# Altium PCB SimpleFlashlight.PcbDoc
Units mm, origin at the board's own origin, x right, y up, seen from the top; angles counter-clockwise.
Board outline 26 x 18.2 mm, 2 copper layers (Top Layer, Bottom Layer), stack 1 mm thick; 17 components, 9 nets, 35 pads, 9 vias.
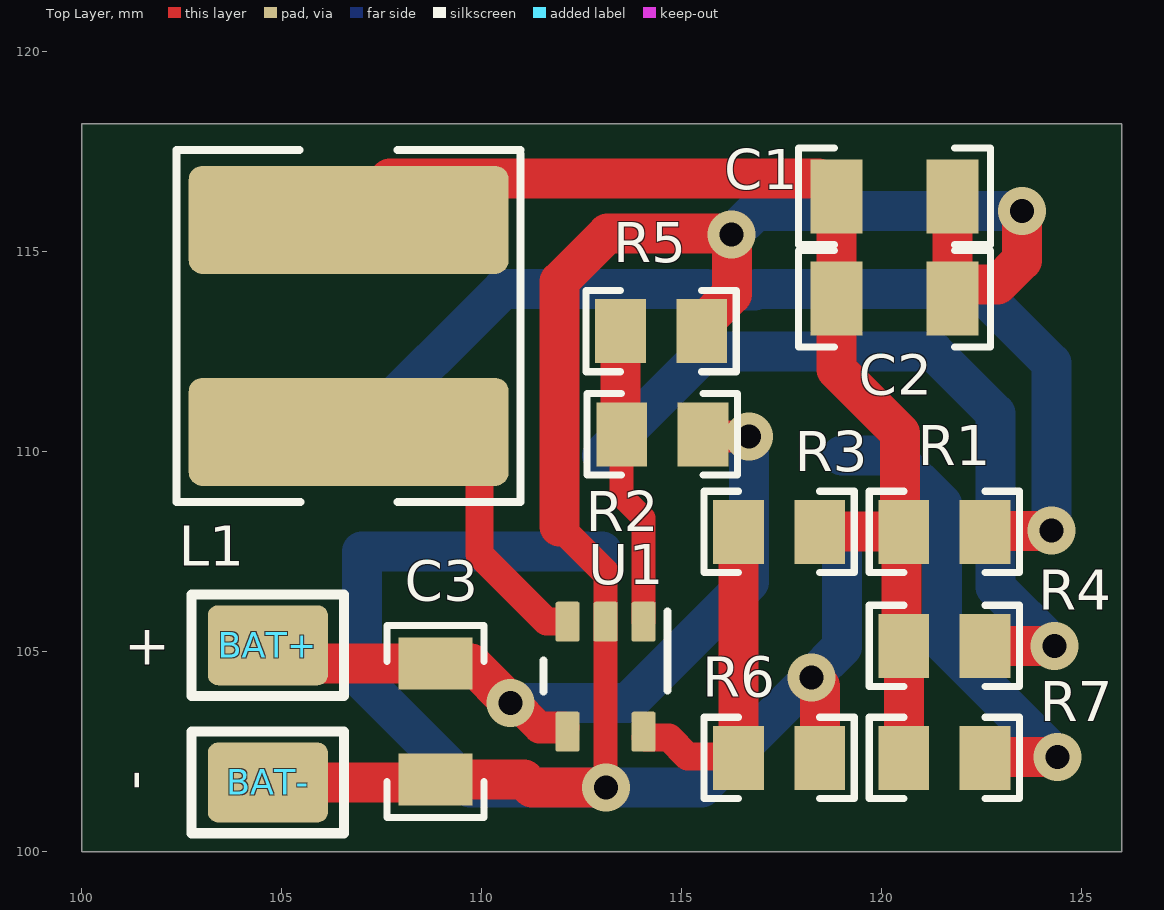
[diagram p0: Top Layer view]
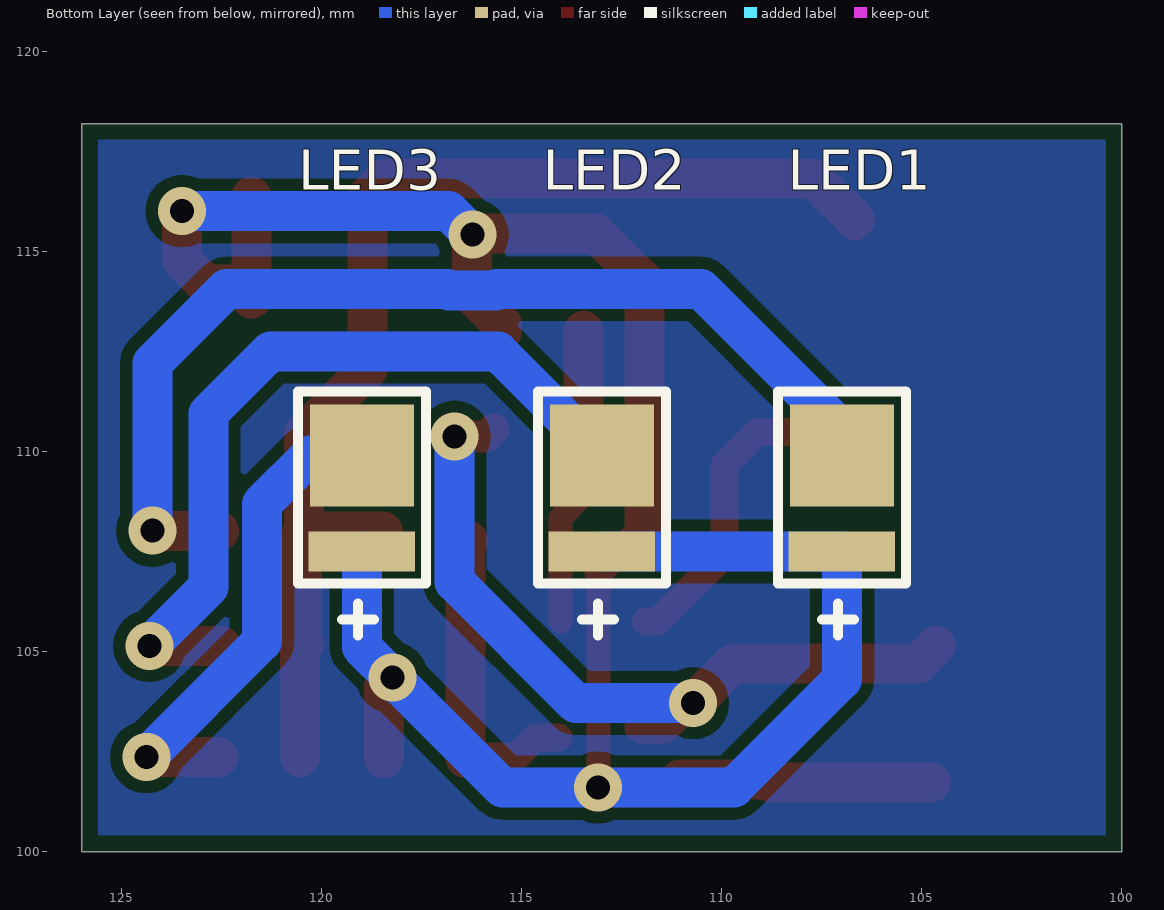
[diagram p1: Bottom Layer view, seen from below]
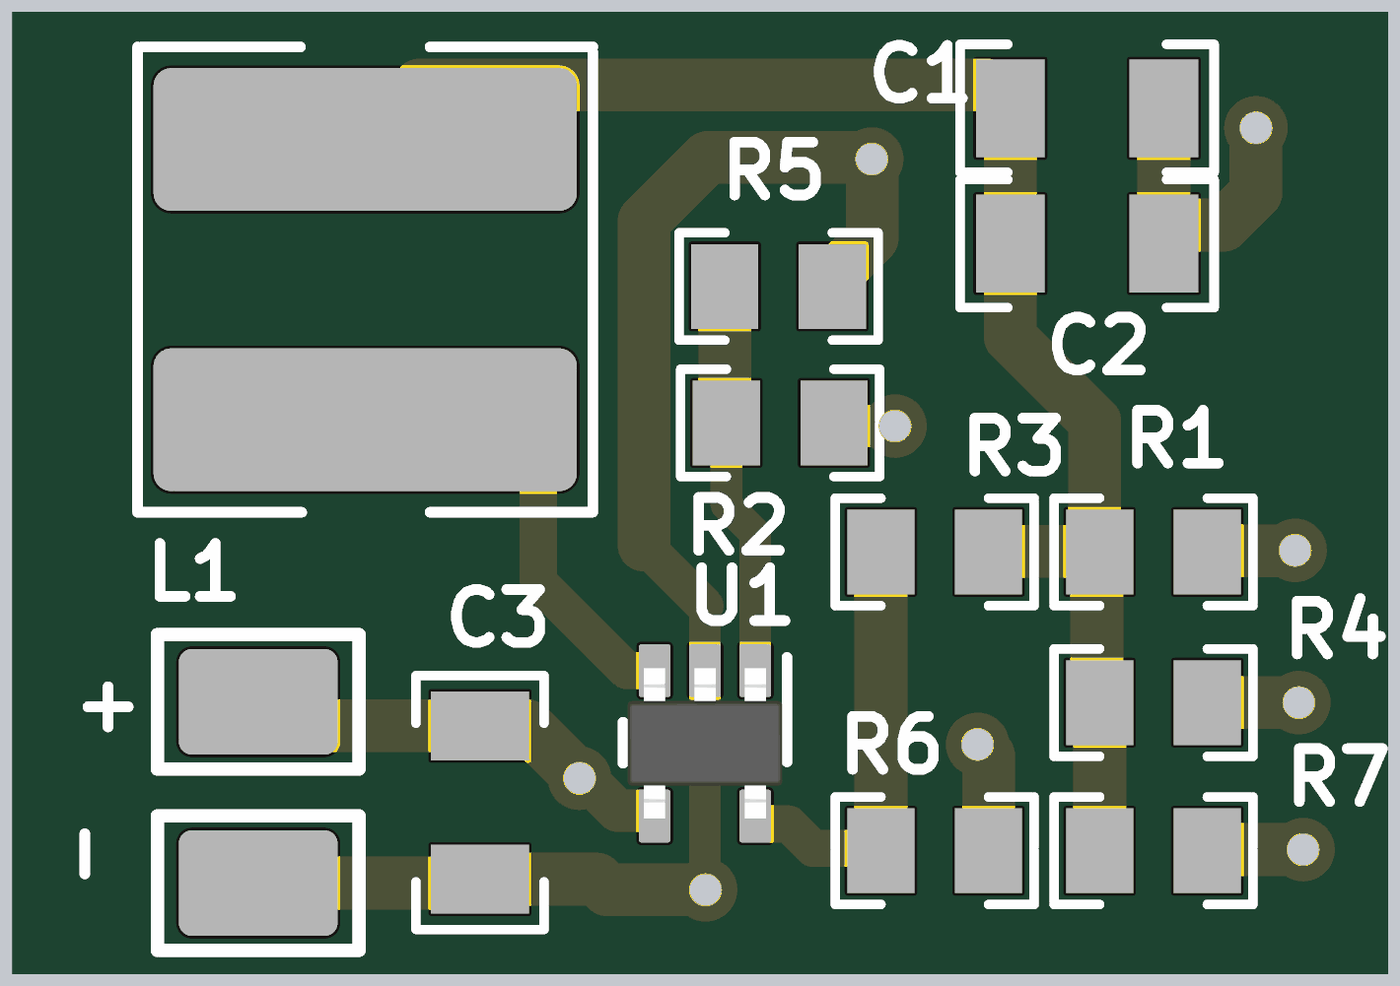
[diagram p2: 3D render of the assembled board from above, using the file's embedded part models]
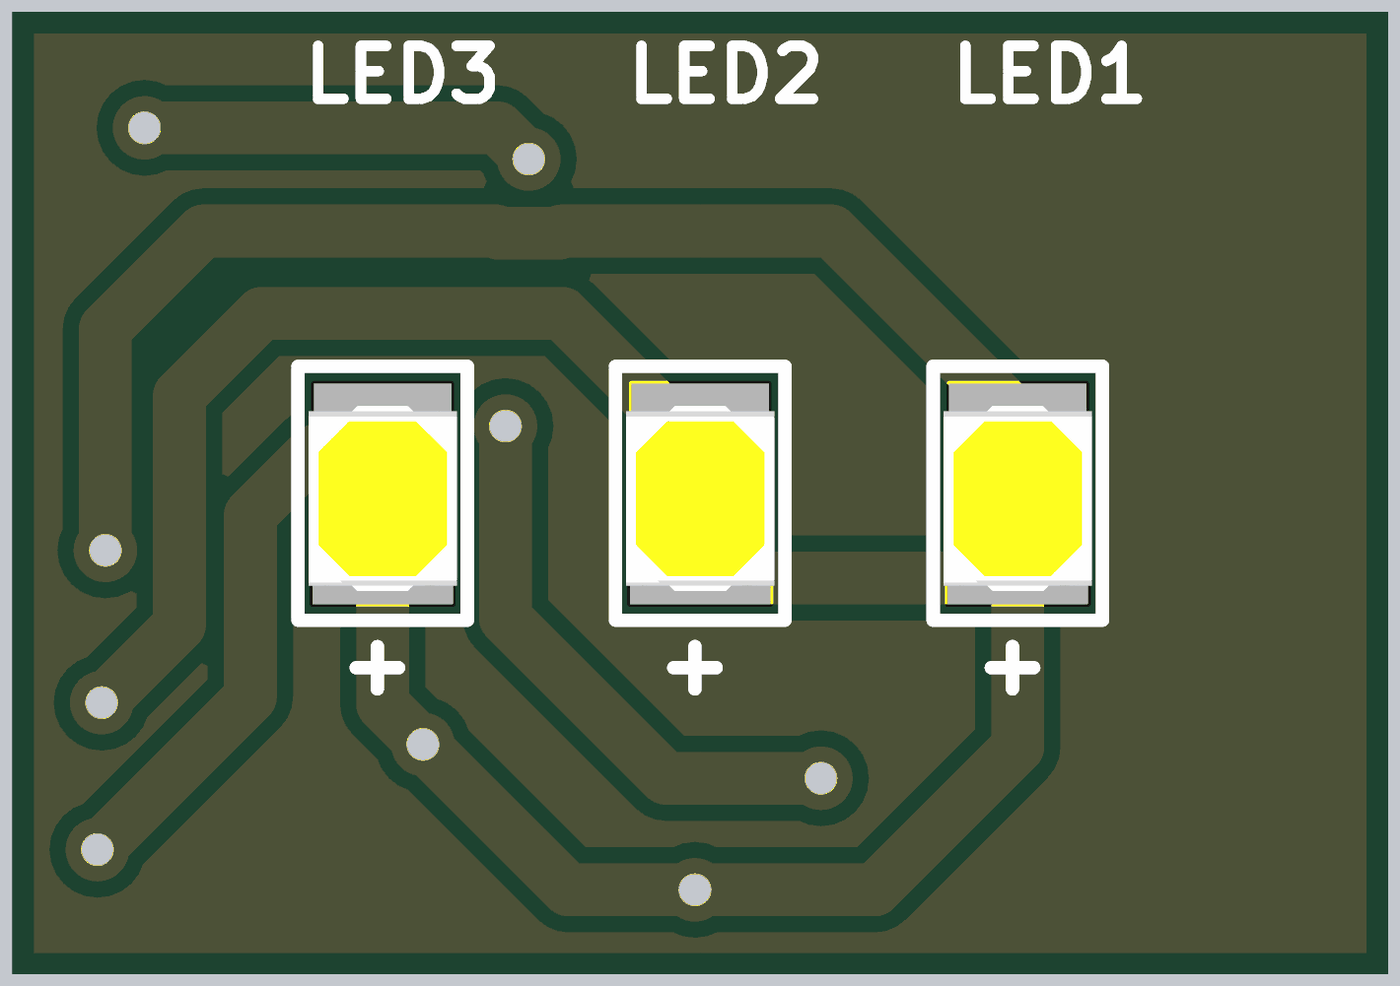
[diagram p3: 3D render of the assembled board from below, using the file's embedded part models]

## Layer stack, top to bottom
Top Solder: solder mask 0.04, Solder Resist, Dk 3.5
Top Layer: signal copper 0.018
Dielectric 1: dielectric 0.964, FR-4, Dk 4.8
Bottom Layer: signal copper 0.018
Bottom Solder: solder mask 0.04, Solder Resist, Dk 3.5

## Board outline
100,100 100,118.2 126,118.2 126,100

## Design rules (kind name [scope] priority, off if disabled: settings)
BoardOutlineClearance [All] p1: gap=0.4 ignorepadtopadclearanceinfootprint=FALSE
Clearance Clearance_different_net [All] p1: gap=0.3 ignorepadtopadclearanceinfootprint=FALSE
DiffPairsRouting [All] p1 off: maxlimit=0.254 minlimit=0.254 mostfreqgap=0.254 toplayer_minwidth=0.381 toplayer_maxwidth=0.381 toplayer_prefwidth=0.381 bottomlayer_minwidth=0.381 bottomlayer_maxwidth=0.381 bottomlayer_prefwidth=0.381 maxuncoupledlength=12.7
HoleSize [All] p1: absolutevalues=TRUE maxlimit=6.3 minlimit=0.2 maxpercent=80.000 minpercent=20.000 // Drill Hole Size Tolerance +0.13/-0.08mm
HoleToHoleClearance [All] p1: gap=0.5 allowstackedmicrovias=TRUE
MinimumAnnularRing [All] p1: minimumring=0.3 // For PTH
MinimumSolderMaskSliver [All] p1: minsoldermaskwidth=0.2
PlaneConnect [All] p1: planeconnectstyle=Relief reliefexpansion=0.508 reliefentries=4 reliefconductorwidth=0.3 reliefairgap=0.254
PolygonConnect [All] p1: connectstyle=Relief reliefconductorwidth=0.5 reliefentries=4 polygonreliefangle="90 Angle" airgapwidth=0.254
RoomDefinition ComponentsArea [All] p1: confinementstyle=ConfineIn formatcopy=TRUE lockcomponents=FALSE outline 100,99.95 cw(c100,100) 100,100.05 102.801,100.05 cw(c103.25,101) 102.2,101 102.2,117.2 cw(c103.25,117.2) 102.801,118.15 100,118.15 cw(c100,118.2) 100,118.25 126,118.25 cw(c126,118.2) 126.05,118.2 cw(c126,118.2) 126,118.15 123.199,118.15 cw(c122.75,117.2) 123.8,117.2 123.8,101 cw(c122.75,101) 123.199,100.05 126,100.05 cw(c126,100) 126.05,100 cw(c126,100) 126,99.95
RoutingVias [All] p1: holewidth=0.6 width=1.2 viastyle="Through Hole" minholewidth=0.3 minwidth=0.6 maxholewidth=5 maxwidth=5
SilkToSilkClearance [All] p1: silktosilkclearance=0.2
SilkToSolderMaskClearance [IsPad] p1: minsilkscreentomaskgap=0.1 clearancetoexposedcopper=TRUE
SolderMaskExpansion [All] p1: expansion=0.05
Width [All] p1: maxlimit=5 minlimit=0.3 preferedwidth=1
23 further rules are at their usual default settings.

## Components (designator, comment, footprint, x,y, rotation, side; value= is the part's Value field where it differs from the comment)
BAT+ "+" KEYSTONE5000 104.648,105.156 r180 top
BAT- "-" KEYSTONE5000 104.648,101.727 r180 top
C1 "22uF" 1206 120.31,116.38 r0 top
C2 "1uF" 1206 120.31,113.82 r0 top
C3 "10uF" 1206 108.839,103.251 r270 top
L1 "10uH" WE-PD_6033 106.67,113.14 r90 top
LED1 "2.8V 0.07A" "LED 2835" 107,109.1 r270 bottom
LED2 "2.8V 0.07A" "LED 2835" 113,109.1 r270 bottom
LED3 "2.8V 0.07A" "LED 2835" 119,109.1 r270 bottom
R1 "6.8" 0805_HV 121.564,107.99 r0 top
R2 "12k" 0805_HV 114.51,110.43 r0 top
R3 "62k" 0805_HV 117.43,107.99 r0 top
R4 "6.8" 0805_HV 121.564,105.14 r0 top
R5 "11k" 0805_HV 114.48,113.01 r180 top
R6 "20k" 0805_HV 117.43,102.34 r180 top
R7 "6.8" 0805_HV 121.564,102.34 r0 top
U1 "TPS560200DBVR" DBV0005A_N 113.09,104.37 r270 top

## Footprints (in the part's own frame and the unit in brackets; to place one, negate y for a bottom-side part, rotate by r counter-clockwise, add the part's x,y. Pads: shape width x height; smd on the part's side, far side on the other; paste and mask are expansions set on the pad)
0805_HV [mil]
  rect 50x63 smd: 1(-40,0) 2(40,0)
  silkscreen extent -74,-40 74,40, body extent -50,-25 50,25, height 22
1206 [mm]
  rect 1.3x1.85 smd: 1(-1.45,0) 2(1.45,0)
  silkscreen extent -2.4,-1.21 2.4,1.21, body extent -1.63,-0.79 1.57,0.84, height 1.64
DBV0005A_N [mm]
  rrect17% 1x0.6 smd: 1(-1.375,0.95) 2(-1.375,0) 3(-1.375,-0.95) 4(1.375,-0.95) 5(1.375,0.95)
  silkscreen extent -1.63,-1.55 0.38,1.55, body extent -1.42,-1.46 1.42,1.46, height 1.09
KEYSTONE5000 [mm]
  rrect25% 3x2 smd: 1(0,0)
  silkscreen extent -1.91,-1.27 1.91,1.27, body extent -1.25,-1.24 1.24,1.25, height 0.03
"LED 2835" [mm]
  rect 2.55x2.6 smd: 1(-0.8,0)
  rect 1x2.66 smd: 2(1.6,0)
  silkscreen extent -2.4,-1.6 3.7,1.6, body extent -1.65,-1.4 1.85,1.4, height 1.62
WE-PD_6033 [mm]
  rrect25% 2.7x8 smd: 1(-2.65,0) 2(2.65,0)
  silkscreen extent -4.4,-4.3 4.4,4.3, body extent -3.9,-3.9 3.9,3.9, height 5.31

## Part data
BAT+: library part 5000, "Power connection pad", ComponentLink1Description="Datasheet Link", ComponentLink1URL=http://www.keyelco.com/userAssets/file/M60-2p60.pdf, CompType="Test Point Loop"
BAT-: library part 5001, "Power connection pad", ComponentLink1Description="Datasheet Link", ComponentLink1URL=http://www.keyelco.com/userAssets/file/M60-2p60.pdf, CompType="Test Point Loop"
C1: library part Capacitor, "Capacitor ceramic", Manufacturer=MuRata, Manufacturer Part Number=GRM31CR61C226KE15L, ComponentLink1Description="Datasheet link", ComponentLink1URL=http://search.murata.co.jp/Ceramy/PnsearchViewAction.do?HnOFG=ON&HnNFG=ON&SEL_CNT=50&sLang=en&sKey=GRM188R71C105KA12D&x=9&y=9&search=startwith, Order_Code_ChipIDip=9000103922
C2: library part Capacitor, "Capacitor ceramic", Manufacturer=MuRata, Manufacturer Part Number=GRM188R61A105K, ComponentLink1Description="Datasheet link", ComponentLink1URL=http://search.murata.co.jp/Ceramy/PnsearchViewAction.do?HnOFG=ON&HnNFG=ON&SEL_CNT=50&sLang=en&sKey=GRM188R71C105KA12D&x=9&y=9&search=startwith, Order_Code_ChipIDip=886959440
C3: library part Capacitor, "Capacitor ceramic", Manufacturer=MuRata, Manufacturer Part Number=GRM21BR71A106KE51L, ComponentLink1Description="Datasheet link", ComponentLink1URL=http://search.murata.co.jp/Ceramy/PnsearchViewAction.do?HnOFG=ON&HnNFG=ON&SEL_CNT=50&sLang=en&sKey=GRM188R71C105KA12D&x=9&y=9&search=startwith, Order_Code_ChipIDip=9000122622
L1: library part Inductor, "Inductor, Unshielded Drum Core, Metal Composite, SMD", Manufacturer=Bourns, Manufacturer Part Number=SDR0805-100ML, ComponentLink1Description="Datasheet link", ComponentLink1URL=http://katalog.we-online.de/kataloge/eisos/media/pdf/744778510.pdf, CompType=Inductor, Order_Code_ChipIDip=246436964
LED1 LED2 LED3: library part "SMD LED", "SMD LED", CurrentMAX=0.07, ForvardVoltage=2.82, Manufacturer=ENLINCA, Manufacturer Part Number=None, ComponentLink1Description="Datasheet link", ComponentLink1URL=http://www.vishay.com/docs/88516/1n5400.pdf, Order_Code_ChipIDip=None, ProductLink=https://aliexpress.ru/item/32975372003.html?spm=a2g39.orderlist.0.0.22a94aa61JPlpc&_ga=2.238780616.970507921.1639827810-654681520.1604340042&_gac=1.162479310.1639346332.Cj0KCQiA2NaNBhDvARIsAEw55hg0RpnmDiEVLwfBwV1DBwQRRzTZISLV43c0hEMg0tSMQHOqo776kiQaArGpEALw_wcB, Type="SMD LED"
R1 R4 R7: library part Resistor, "Thick Film Chip Resistor", Manufacturer=Yageo, Manufacturer Part Number=RC0805FR-076R8L, ComponentLink1Description="Manufacturer Link", ComponentLink1URL=http://www.panasonic.com/industrial/components/resistive_products.htm, ComponentLink2Description=Datasheet, ComponentLink2URL=http://www.panasonic.com/industrial/components/pdf/AOA0000CE2.pdf, Order_Code_ChipIDip=9000079932
R2: library part Resistor, "Thick Film Chip Resistor", Manufacturer=Yageo, Manufacturer Part Number=RC0805FR-0712KL, ComponentLink1Description="Manufacturer Link", ComponentLink1URL=http://www.panasonic.com/industrial/components/resistive_products.htm, ComponentLink2Description=Datasheet, ComponentLink2URL=http://www.panasonic.com/industrial/components/pdf/AOA0000CE2.pdf, Order_Code_ChipIDip=9000079516
R3: library part Resistor, "Thick Film Chip Resistor", Manufacturer=Yageo, Manufacturer Part Number=RC0805FR-0762KL, ComponentLink1Description="Manufacturer Link", ComponentLink1URL=http://www.panasonic.com/industrial/components/resistive_products.htm, ComponentLink2Description=Datasheet, ComponentLink2URL=http://www.panasonic.com/industrial/components/pdf/AOA0000CE2.pdf, Order_Code_ChipIDip=9000079533
R5: library part Resistor, "Thick Film Chip Resistor", Manufacturer=Yageo, Manufacturer Part Number=RC0805FR-0711KL, ComponentLink1Description="Manufacturer Link", ComponentLink1URL=http://www.panasonic.com/industrial/components/resistive_products.htm, ComponentLink2Description=Datasheet, ComponentLink2URL=http://www.panasonic.com/industrial/components/pdf/AOA0000CE2.pdf, Order_Code_ChipIDip=9000079515
R6: library part Resistor, "Thick Film Chip Resistor", Manufacturer=Yageo, Manufacturer Part Number=RC0805FR-0720KL, ComponentLink1Description="Manufacturer Link", ComponentLink1URL=http://www.panasonic.com/industrial/components/resistive_products.htm, ComponentLink2Description=Datasheet, ComponentLink2URL=http://www.panasonic.com/industrial/components/pdf/AOA0000CE2.pdf, Order_Code_ChipIDip=9000079521
U1: "4.5V to 18V Input, 500mA Synchronous Step Down SWIFT Converter with Advanced Eco-mode, DBV0005A", Manufacturer="Texas Instruments", ComponentLink1Description="Datasheet Link", ComponentLink1URL=http://www.ti.com/lit/ds/symlink/tps560200.pdf, Manufacturer Part Number=TPS560200DBVR, Order_Code_ChipIDip=9000200421, PackageReference=DBV0005A

## Via types
v1: diameter 1.2, hole 0.6, Top Layer to Bottom Layer, tented both sides, 9 vias

## Nets (pads, with @x,y where several pads share a name; then routed paths per layer and width w, separated by ;. In a path a pad name is that pad's centre, name@x,y a point inside that pad or via, vN(x,y) a via of type N, cw(c..) or ccw(c..) an arc to the next point about the centre after c; other vN are vias at no path point)
+3.3V: C1.1 C2.1 L1.2 R1.1 R3.2 R4.1 R7.1 | length 29.6
  Top Layer w1: L1.2 107.7,116.82 118.42,116.82 C1.1 C2.1 118.86,112.052 120.454,110.458 R1.1@120.454,108 ; R3.2@118.476,108 R1.1@120.454,108 ; R4.1@120.454,105.18 R4.1@120.494,105.14 ; R7.1@120.548,102.36 120.548,105.086 R4.1@120.494,105.14 ; R1.1@120.454,108 120.494,107.96 R4.1@120.494,105.14
+9V: BAT+.1 C3.1 R2.2 U1.4 | length 20.1
  Top Layer w0.8: v1@110.745,103.735 110.803,103.735 111.443,103.095 U1.4@112.04,103.095 ; R2.2@115.706,110.55 115.886,110.37 v1(116.68,110.37)
  Top Layer w1: BAT+.1 105.103,104.701 C3.1 109.729,104.701 v1(110.72,103.71)
  Bottom Layer w1: v1(110.72,103.71) 113.65,103.71 116.68,106.74 v1(116.68,110.37)
EN: R2.1 R5.2 U1.1 | length 7.5
  Top Layer w0.6: R2.1@113.464,110.46 R2.1 113.494,108.886 114.04,108.34 U1.1
  Top Layer w1: R2.1@113.464,110.46 R5.2
GND: BAT-.1 C1.2 C2.2 C3.2 LED1.2 LED2.2 LED3.2 R5.1 R6.1 U1.2 | length 70.8
  Top Layer w0.6: v1@113.09,101.6 U1.2 113.09,106.97
  Top Layer w0.7: 111.94,108.12 113.09,106.97
  Top Layer w1: BAT-.1@104.775,101.727 108.765,101.727 C3.2 111.05,101.801 111.251,101.6 113.09,101.6 v1(113.1,101.6) ; 111.94,108.12 111.94,114.25 113.14,115.45 116.25,115.45 116.25,113.929 115.496,113.175 R5.1 ; v1(118.24,104.35) 118.446,104.144 R6.1 ; C1.2 C2.2 122.11,114.17 122.89,114.17 123.5,114.78 v1(123.5,116.01)
  Bottom Layer w1: LED2.2 LED1.2 107,104.3 109.7,101.6 v1(113.1,101.6) 115.49,101.6 v1(118.24,104.35) 119,105.11 LED3.2 ; v1(116.24,115.42) 116.83,116.01 v1(123.5,116.01)
NetL1_1: L1.1 U1.3 | length 8.5
  Top Layer w0.7: L1.1 109.11,110.49 109.94,109.66 109.94,107.42 111.615,105.745 U1.3@111.91,105.745
NetLED1_1: LED1.1 R1.2 | length 26
  Top Layer w1: R1.2@122.576,108.01 124.23,108.01 v1(124.24,108.02)
  Bottom Layer w1: LED1.1 107,110.54 110.52,114.06 115.62,114.06 115.66,114.02 116.82,114.02 116.86,114.06 122.39,114.06 124.24,112.21 v1(124.24,108.02)
NetLED2_1: LED2.1 R4.2 | length 19.8
  Top Layer w1: R4.2@122.526,105.14 v1(124.31,105.14)
  Bottom Layer w1: LED2.1 115.6,112.5 121.29,112.5 122.84,110.95 122.84,106.61 v1(124.31,105.14)
NetLED3_1: LED3.1 R7.2 | length 12.3
  Top Layer w1: R7.2@122.58,102.36 v1(124.39,102.36)
  Bottom Layer w1: LED3.1 120.29,109.9 121.5,108.69 121.5,105.25 v1(124.39,102.36)
VSENSE: R3.1 R6.2 U1.5 | length 7.9
  Top Layer w0.7: U1.5@114.09,102.845 114.675,102.845 115.139,102.381 116.155,102.381 R6.2@116.264,102.49
  Top Layer w1: R3.1@116.35,107.774 116.414,107.71 R6.2

## Polygon pours and split planes (outlines as drawn)
no net on Bottom Layer "NONET_L02_P003" (solid, pour order 3): 100,100 100,118.2 126,118.2 126,100

## Silkscreen, mask and mechanical layers (free items; w line width, h text height)
M1-Board Shape:
  lines w0.1: 103.25,100 107.135,100 118.865,100 122.75,100 ; 103.25,118.2 107.671,118.2 118.329,118.2 122.75,118.2 ; 100,100 100,118.2 126,118.2 126,100 100,100
M7-Top Info:
  lines w0.1: 103.25,100 cw(c103.25,101) 102.25,101 102.25,107.1 102.25,117.2 cw(c103.25,117.2) 103.25,118.2 ; 122.75,100 ccw(c122.75,101) 123.75,101 123.75,107.1 123.75,117.2 ccw(c122.75,117.2) 122.75,118.2
M8-Bottom Info:
  lines w0.1: 100,109.1 126,109.1 ; 113,100 113,118.2
M9-Top Stiffener:
  lines w0.203: 0.13,60.455 5.21,60.455 ; 0.13,120.78 5.21,120.78 ; 0.13,181.105 5.21,181.105 ; 63.63,0.13 63.63,5.21 ; 63.63,236.35 63.63,241.43 ; 127.13,0.13 127.13,5.21 ; 127.13,236.35 127.13,241.43 ; 173.167,5.21 173.167,20.704 299.723,20.704 ; 190.63,0.13 190.63,5.21 ; 190.63,236.35 190.63,241.43 ; 254.13,0.13 254.13,5.21 ; 254.13,236.35 254.13,241.43 ; 299.723,5.21 299.723,20.704 ; 299.723,13.084 375.923,13.084 ; 299.723,28.324 375.923,28.324 ; 299.748,43.412 375.948,43.412 ; 317.63,0.13 317.63,5.21 ; 317.63,236.35 317.63,241.43 ; 337.95,5.464 337.95,20.704 ; 375.923,20.704 299.723,20.704 ; 375.923,35.944 299.723,35.944 ; 376.05,35.69 376.05,5.21 ; 376.05,56.124 299.748,56.124 299.723,56.124 299.723,43.412 299.723,35.944 ; 376.05,60.455 381.13,60.455 ; 376.05,120.78 381.13,120.78 ; 376.05,181.105 381.13,181.105 ; 299.723,20.704 299.723,35.944 ; 376.05,5.21 376.05,236.35 5.21,236.35 5.21,5.21 376.05,5.21 ; 0.13,0.13 0.13,241.43 381.13,241.43 381.13,0.13 0.13,0.13
  text "1" at 31.406,238.128 h1.78
  text "2" at 94.796,238.128 h1.78
  text "3" at 158.025,238.128 h1.78
  text "4" at 221.694,238.128 h1.78
  text "5" at 285.169,238.128 h1.78
  text "6" at 348.796,238.128 h1.78
  text "A" at 2.035,209.096 h1.78
  text "A" at 377.955,209.096 h1.78
  text "B" at 2.035,148.644 h1.78
  text "B" at 377.955,148.644 h1.78
  text "C" at 2.035,88.319 h1.78
  text "C" at 377.955,88.319 h1.78
  text "PROJECT TITLE:" at 300.739,41.049 h1.14
  text ".PRJ_Title" at 304.612,37.633 h1.27
  text "DESIGNED FOR:" at 300.739,33.404 h1.14
  text ".PRJ_Customer" at 302.009,29.848 h1.78
  text "D" at 2.035,28.121 h1.78
  text "D" at 377.955,28.121 h1.78
  text "FILE NAME:" at 300.739,25.784 h1.14
  text ".PCB_File_Name_No_Path" at 302.009,22.736 h1.78
  text "... and/or its licensors do not warrant the accuracy or completeness of this specification" at 174.514,18.625 h1.14
  text "ENGINEER:" at 300.739,18.418 h1.14
  text "LAYOUT BY:" at 338.966,18.418 h1.14
  text "or any information contained therein. ... and/or its licensors do not warrant that this design will meet" at 173.371,15.764 h1.14
  text ".PRJ_Engineer" at 302.009,14.481 h1.78
  text ".PCB_Layout" at 340.249,14.481 h1.78
  text "the specifications, will be suitable for your application or fit for any particular purpose, or will operate in" at 173.371,12.902 h1.14
  text "ALTIUM DESIGNER VERSION:" at 338.966,10.544 h1.14
  text "an implementation. ... and/or its licensors do not warrant that the design is production worthy. You should" at 173.371,10.04 h1.14
  text "completely validate and test your design implementation to confirm the system functionality for your application." at 174.514,7.178 h1.14
  text ".print_Scale" at 302.009,7.157 h1.78
  text ".Application_BuildNumber" at 340.249,7.157 h1.78
  text "2" at 94.796,1.908 h1.78
  text "3" at 158.025,1.908 h1.78
  text "4" at 221.694,1.908 h1.78
  text "5" at 285.169,1.908 h1.78
  text "6" at 348.796,1.908 h1.78
M10-Bottom Stiffener:
  drawing of 228 lines, arcs and shapes, not listed
  text "DESIGN INFORMATION" at 327.102,206.854 h1.52
  text "(REFER ALSO ARRAY/PANEL PROFILING INFORMATION)" at 317.918,202.746 h1.52
  text "BOARD SIZE" at 300.494,202.637 h1.52
  text "69mm" at 312.237,199.391 h1.52
  text "X" at 325.081,199.391 h1.52
  text "70mm" at 330.956,199.391 h1.52
  text "Number of Layers :" at 310.73,194.382 h1.52
  text "4" at 338.538,194.128 h1.52
  text "MIN. TRACK WIDTH:" at 310.73,190.852 h1.52
  text "8" at 338.574,190.852 h1.52
  text "MIL" at 342.505,190.852 h1.52
  text "MIN. CLEARANCE:" at 310.73,187.499 h1.52
  text "MIL" at 342.505,187.499 h1.52
  text "7" at 337.566,187.423 h1.52
  text "MIN. VIA DRILL SIZE:" at 310.73,184.146 h1.52
  text "MIL" at 342.505,184.146 h1.52
  text "7.87" at 336.042,184.07 h1.52
  text "5.91 MIL" at 328.383,180.547 h1.52
  text "MINIMUM ANNULAR RING" at 302.367,180.438 h1.52
  text "EXTERNAL" at 346.366,180.438 h1.52
  text "PER" at 307.447,177.44 h1.52
  text "IPC-D-275 CLASS 2 LEVEL C" at 313.035,177.44 h1.52
  text "MIL, HOLES" at 350.836,174.588 h1.52
  text "+/-" at 340.868,174.57 h1.52
  text "+/-" at 362.56,174.57 h1.52
  text "REGISTRATION TOLERANCES:" at 302.367,174.443 h1.52
  text "METAL" at 332.842,174.443 h1.52
  text "5" at 347.477,174.443 h1.52
  text "3" at 368.635,174.443 h1.52
  text "MIL" at 371.588,174.443 h1.52
  text "MATERIAL:" at 300.468,169.123 h1.52
  text "FR-4 High Tg" at 325.524,165.558 h1.52
  text "X" at 321.462,165.375 h1.52
  text "FR-408" at 311.162,165.341 h1.52
  text "OTHER" at 348.957,165.341 h1.52
  text "63 MIL (1.6mm) +/-10%" at 319.292,161.208 h1.52
  text "THICKNESS:" at 302.367,161.099 h1.52
  text "X" at 316.037,161.099 h1.52
  text "OTHER" at 351.929,161.099 h1.52
  text "TOLERANCE:" at 302.367,157.086 h1.52
  text "X" at 323.686,157.086 h1.52
  text "ANSI IPC-6012 TYPE 3 CLASS 2" at 328.434,157.086 h1.52
  text "OTHER +/-" at 328.434,153.123 h1.52
  text "BOW & TWIST:" at 302.367,149.136 h1.52
  text "X" at 323.686,149.136 h1.52
  text "ANSI IPC-6012 TYPE 3 CLASS 2" at 328.434,149.136 h1.52
  text "OTHER +/-" at 328.434,145.11 h1.52
  text "COPPER THICKNESS (FINISHED):" at 300.468,141.668 h1.52
  text "1.4MIL (1oz)" at 322.82,137.789 h1.52
  text "2MIL (1.4oz)" at 342.302,137.789 h1.52
  text "2.8MIL (2oz)" at 360.768,137.789 h1.52
  text "X" at 357.403,137.74 h1.52
  text "OUTER:" at 309.536,137.68 h1.52
  text "1.4MIL (1oz)" at 322.82,133.801 h1.52
  text "2.8MIL (2oz)" at 342.302,133.801 h1.52
  text "N/A" at 360.756,133.81 h1.52
  text "X" at 339.344,133.727 h1.52
  text "INNER SIGNAL:" at 302.193,133.692 h1.52
  text "DRILLING:" at 300.468,130.162 h1.52
  text "REFERENCE:" at 302.367,127.19 h1.52
  text "X" at 318.832,127.19 h1.52
  text "AS SHOWN" at 323.582,127.19 h1.52
  text "X" at 341.718,127.19 h1.52
  text "NC_DRILL FILES" at 345.198,127.19 h1.52
  text "PTH MIN COPPER THICKNESS:" at 302.367,123.177 h1.52
  text "X" at 336.663,123.177 h1.52
  text "1MIL" at 340.143,123.177 h1.52
  text "OTHER" at 352.767,123.177 h1.52
  text "BOARD FINISH:" at 300.468,119.138 h1.52
  text "SILKSCREEN:" at 304.411,116.141 h1.52
  text "X" at 328.51,116.141 h1.52
  text "TOP" at 331.71,116.141 h1.52
  text "X" at 341.464,116.141 h1.52
  text "BOTTOM" at 344.69,116.141 h1.52
  text "SILKSCREEN COLOR:" at 304.411,111.899 h1.52
  text "X" at 328.483,111.899 h1.52
  text "WHITE" at 331.71,111.899 h1.52
  text "OTHER" at 344.69,111.899 h1.52
  text "SOLDER RESIST COLOR:" at 304.411,107.581 h1.52
  text "X" at 318.832,103.538 h1.52
  text "GREEN" at 322.058,103.538 h1.52
  text "BLUE" at 337.07,103.538 h1.52
  text "OTHER" at 350.735,103.538 h1.52
  text "IMMERSION GOLD (ENIG)" at 327.418,98.749 h1.52
  text "ENEPIG" at 361.391,98.666 h1.52
  text "SURFACE FINISH:" at 300.468,98.64 h1.52
  text "X" at 322.669,98.64 h1.52
  text "IMM. TIN/SILVER OR EQUIV" at 308.839,94.653 h1.52
  text "OTHER" at 345.198,94.653 h1.52
  text "ARRAY/PANEL:" at 300.468,90.106 h1.52
  text "CUT AND TRIM PER MECH LAYER 1" at 327.418,89.997 h1.52
  text "N.C. ROUTE" at 327.418,86.144 h1.52
  text "X" at 344.664,86.144 h1.52
  text "V. SCORE" at 349.414,86.144 h1.52
  text "CERTIFICATION:" at 300.468,82.664 h1.52
  text "MATERIALS AND WORKMANSHIP FOR ALL PCBS" at 318.883,82.664 h1.52
  text "TO MEET OR EXCEED THE REQUIREMENTS OF:" at 318.883,80.175 h1.52
  text "X" at 309.396,76.707 h1.52
  text "ANSI IPC-A-600F CLASS ->" at 312.927,76.707 h1.52
  text "X" at 354.559,76.707 h1.52
  text "2" at 357.58,76.707 h1.52
  text "1" at 349.579,76.669 h1.52
  text "3" at 366.572,76.669 h1.52
  text "X" at 309.449,72.656 h1.52
  text "UL 94V-0" at 312.927,72.656 h1.52
  text "X" at 330.073,72.656 h1.52
  text "RoHS" at 333.552,72.656 h1.52
  text "OTHER" at 349.92,72.656 h1.52
  text "PER ORDER" at 360.005,72.656 h1.52
  text "VIA TENTING:" at 331.394,69.262 h1.52
  text "X" at 350.659,69.151 h1.52
  text "ADDITIONAL REQUIREMENTS:" at 300.468,69.075 h1.52
  text "YES" at 345.355,69.031 h1.52
  text "NO" at 354.621,68.898 h1.52
  text "MICROSECTION:" at 302.367,66.154 h1.52
  text "YES" at 325.373,66.154 h1.52
  text "IMPEDANCE CONTROL:" at 331.953,65.985 h1.52
  text "YES" at 356.946,65.96 h1.52
  text "X" at 370.713,65.782 h1.52
  text "NO" at 366.483,65.52 h1.52
  text "REQUIRED" at 347.255,62.188 h1.52
  text "BARE BOARD ELEC. TEST:" at 302.367,62.115 h1.52
  text "NONE" at 335.533,62.115 h1.52
  text "X" at 344.029,62.115 h1.52
  text "PER ORDER" at 362.292,62.115 h1.52
  text "NOTE :" at 135.335,60.122 h1.52
  text "MANUFACTURER'S UL:" at 302.367,58.127 h1.52
  text "RAIL" at 331.977,58.019 h1.52
  text "METAL" at 344.469,58.019 h1.52
  text "X" at 354,58.01 h1.52
  text "SILK" at 357.466,58.019 h1.52
  text "Only 10 mil vias are tented , others are not tented." at 141.99,57.531 h1.52